# EAGLE board board 5 (EAGLE 5.06)
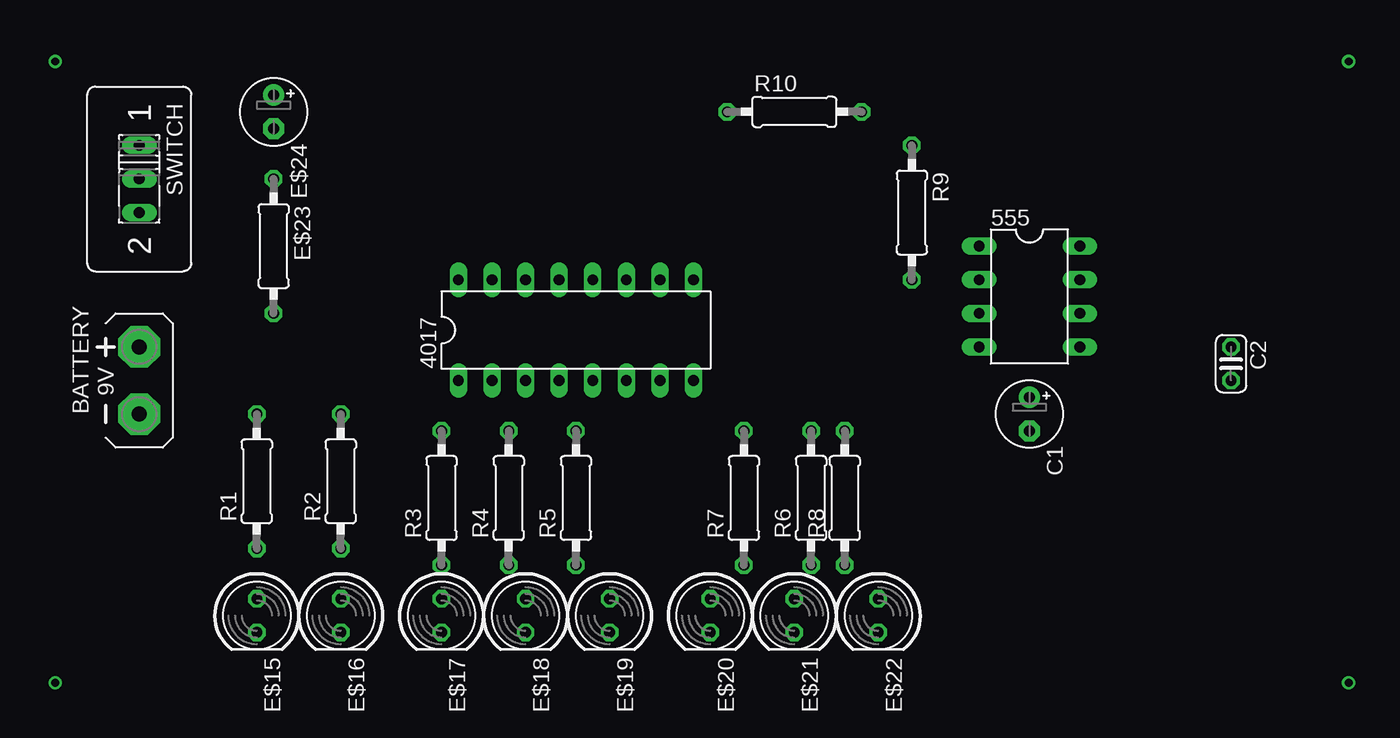
[diagram p0: board, top side]
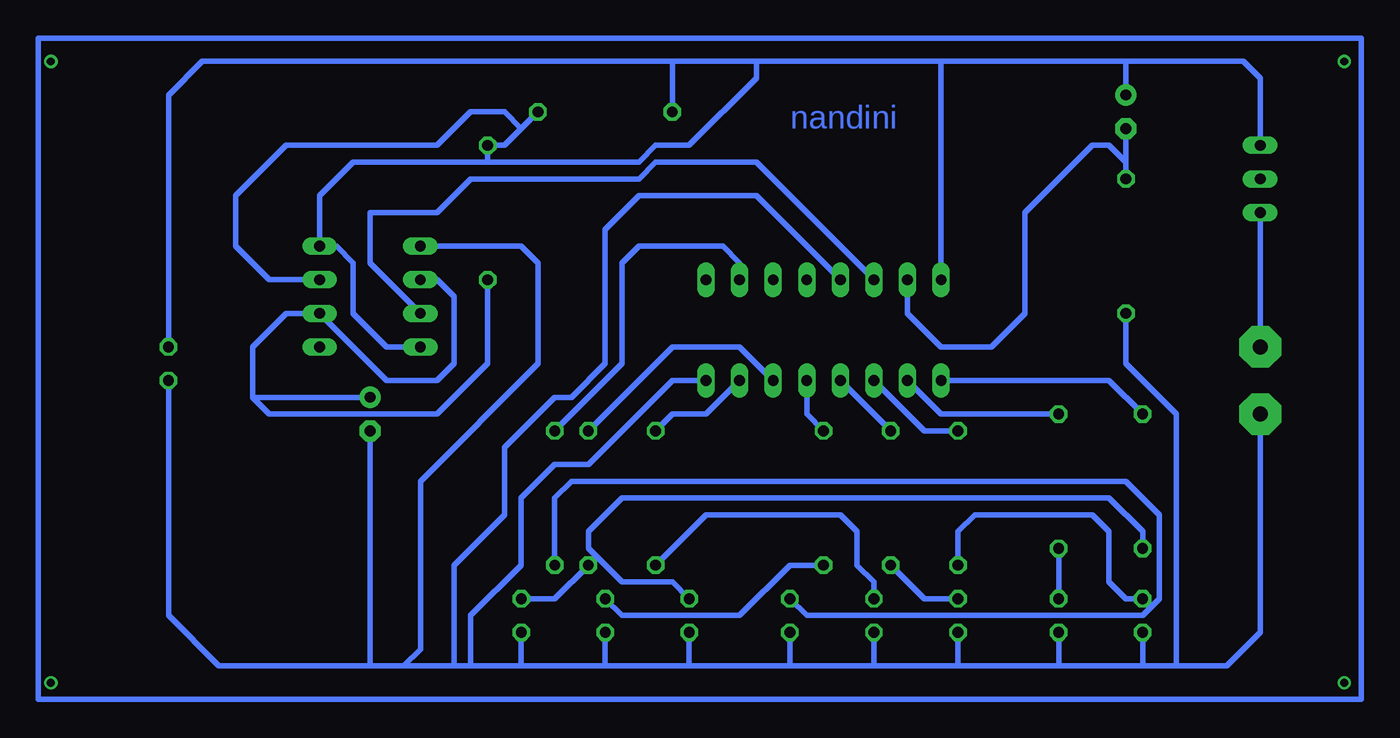
[diagram p1: board, bottom side, seen from below]

No outline drawn. Coordinates in mm, seen from the top.
Copper layers (1*16): Top 0.035mm / dielectric 1.5mm / Bottom 0.035mm
Design rules "default": minimum track width 10mil, minimum drill 24mil, track to track 8mil, track to pad 8mil, pad to pad 8mil, via to via 8mil, smd to smd 8mil, copper to edge 40mil, drill to drill 8mil, minimum pad ring 10mil, minimum via ring 8mil, stop-mask expansion 4mil, vias tented up to drill 0mil, thermal gap 10mil

## Footprints (pad centres in the part's own frame; a part is rotated, then mirrored left to right if it is on the bottom)
DIL08 = drill 0.813 long: 1 -3.81,-3.81; 2 -1.27,-3.81; 3 1.27,-3.81; 4 3.81,-3.81; 5 3.81,3.81; 6 1.27,3.81; 7 -1.27,3.81; 8 -3.81,3.81
DIL16 = drill 0.813 long: 1 -8.89,-3.81; 2 -6.35,-3.81; 3 -3.81,-3.81; 4 -1.27,-3.81; 5 1.27,-3.81; 6 3.81,-3.81; 7 6.35,-3.81; 8 8.89,-3.81; 9 8.89,3.81; 10 6.35,3.81; 11 3.81,3.81; 12 1.27,3.81; 13 -1.27,3.81; 14 -3.81,3.81; 15 -6.35,3.81; 16 -8.89,3.81
AB9V = drill 1.118 pad 3.15 octagon: + 0,2.54; - 0,-2.54
E2,5-5 = drill 0.813 pad 1.6 round: + -1.27,0 | drill 0.813 pad 1.6 octagon: - 1.27,0
C025-024X044 = drill 0.813 octagon: 1 -1.27,0; 2 1.27,0
LED5MM = drill 0.813 octagon: A -1.27,0; K 1.27,0
0207/10 = drill 0.813 octagon: 1 -5.08,0; 2 5.08,0
M251 = drill 0.813 long: 1 -2.54,0; 2 0,0; 3 2.54,0

## Placement (x,y rotation side)
555  [DIL08]  74.93,30.48 270 top
4017  [DIL16]  40.64,27.94 0 top
BATTERY  [AB9V]  7.62,24.13 0 top
C1  [E2,5-5]  74.93,21.59 270 top
C2  [C025-024X044]  90.17,25.4 270 top
E$15  [LED5MM]  16.51,6.35 270 top
E$16  [LED5MM]  22.86,6.35 270 top
E$17  [LED5MM]  30.48,6.35 270 top
E$18  [LED5MM]  36.83,6.35 270 top
E$19  [LED5MM]  43.18,6.35 270 top
E$20  [LED5MM]  50.8,6.35 270 top
E$21  [LED5MM]  57.15,6.35 270 top
E$22  [LED5MM]  63.5,6.35 270 top
E$23  [0207/10]  17.78,34.29 270 top
E$24  [E2,5-5]  17.78,44.45 270 top
R1  [0207/10]  16.51,16.51 90 top
R2  [0207/10]  22.86,16.51 90 top
R3  [0207/10]  30.48,15.24 90 top
R4  [0207/10]  35.56,15.24 90 top
R5  [0207/10]  40.64,15.24 90 top
R6  [0207/10]  58.42,15.24 90 top
R7  [0207/10]  53.34,15.24 90 top
R8  [0207/10]  60.96,15.24 90 top
R9  [0207/10]  66.04,36.83 270 top
R10  [0207/10]  57.15,44.45 0 top
SWITCH  [M251]  7.62,39.37 270 top

## Library data of the parts
555 4017 = ic-package
BATTERY = battery
C1 C2 E$23 E$24 R1-R10 = resistor
E$15-E$22 = led
SWITCH = switch

## Nets
S$2: 555.4 555.8 4017.16 C2.1 E$24.+ R10.1 SWITCH.1
S$4: 4017.1 R1.2
S$6: 4017.15 E$23.1 E$24.-
S$7: E$18.A R7.1
S$8: 4017.2 R2.2
S$9: 555.7 R9.1 R10.2
S$10: E$16.A R2.1
S$11: 4017.3 R3.2
S$12: E$15.A R3.1
S$13: 4017.4 R4.2
S$14: E$17.A R4.1
S$15: 4017.5 R5.2
S$16: 555.1 4017.8 4017.13 C1.- C2.2 E$15.K E$16.K E$17.K E$18.K E$19.K E$20.K E$21.K E$22.K E$23.2
S$17: 4017.6 R6.2
S$18: E$19.A R8.1
S$19: 4017.7 R7.2
S$20: E$20.A R1.1
S$21: 555.2 555.6 C1.+ R9.2
S$22: 4017.10 R8.2
S$23: E$21.A R5.1
S$24: E$22.A R6.1
S$25: 555.3 4017.14
S$28: BATTERY.+ SWITCH.3

## Tracks (layer width: path | path; a pad name or v marks a point on that pad's centre or on a via)
S$1
  Bottom 0.406: 0,0 100,0 100,50 0,50 0,0
S$2
  Bottom 0.406: 555.4 73.66,26.67 76.2,29.21 76.2,33.02 77.47,34.29 555.8 78.74,38.1 76.2,40.64 54.61,40.64 53.34,41.91 50.8,41.91 45.72,46.99 45.72,48.26 | C2.1 90.17,45.72 87.63,48.26 52.07,48.26 | 31.75,48.26 45.72,48.26 | 45.72,48.26 52.07,48.26 | 31.75,48.26 4017.16 | 17.78,48.26 31.75,48.26 | 17.78,48.26 E$24.+ | 17.78,48.26 8.89,48.26 7.62,46.99 SWITCH.1 | 52.07,48.26 R10.1
S$3  (via drill 0.6)
  other vias: 1.27,48.26
S$4
  Bottom 0.406: 4017.1 19.05,24.13 R1.2
S$6
  Bottom 0.406: 4017.15 34.29,29.21 31.75,26.67 27.94,26.67 25.4,29.21 25.4,36.83 20.32,41.91 19.05,41.91 17.78,40.64 | E$23.1 17.78,40.64 | 17.78,40.64 E$24.-
S$7
  Bottom 0.406: E$18.A 36.83,8.89 38.1,10.16 38.1,12.7 39.37,13.97 49.53,13.97 R7.1
S$8
  Bottom 0.406: 4017.2 31.75,21.59 R2.2
S$9
  Bottom 0.406: 555.7 82.55,31.75 85.09,34.29 85.09,38.1 81.28,41.91 69.85,41.91 67.31,44.45 64.77,44.45 63.5,43.18 | 66.04,40.64 R9.1 64.77,41.91 63.5,43.18 | 63.5,43.18 R10.2
S$10
  Bottom 0.406: R2.1 E$16.A
S$11
  Bottom 0.406: 4017.3 33.02,20.32 R3.2
S$12
  Bottom 0.406: R3.1 30.48,12.7 29.21,13.97 20.32,13.97 19.05,12.7 19.05,8.89 17.78,7.62 E$15.A
S$13
  Bottom 0.406: R4.2 4017.4
S$14
  Bottom 0.406: R4.1 33.02,7.62 E$17.A
S$15
  Bottom 0.406: 4017.5 41.91,21.59 R5.2
S$16
  Bottom 0.406: 4017.8 52.07,24.13 58.42,17.78 60.96,17.78 63.5,15.24 63.5,10.16 67.31,6.35 67.31,2.54 | 4017.13 45.72,38.1 54.61,38.1 57.15,35.56 57.15,25.4 59.69,22.86 60.96,22.86 64.77,19.05 64.77,13.97 68.58,10.16 68.58,2.54 | 555.1 63.5,34.29 62.23,33.02 62.23,25.4 71.12,16.51 71.12,3.81 72.39,2.54 | C2.2 90.17,6.35 86.36,2.54 74.93,2.54 | 74.93,2.54 C1.- | 72.39,2.54 74.93,2.54 | 68.58,2.54 72.39,2.54 | 63.5,2.54 67.31,2.54 | 67.31,2.54 68.58,2.54 | 63.5,2.54 E$22.K | 57.15,2.54 63.5,2.54 | 57.15,2.54 E$21.K | 50.8,2.54 57.15,2.54 | 50.8,2.54 E$20.K | 43.18,2.54 50.8,2.54 | 43.18,2.54 E$19.K | 36.83,2.54 43.18,2.54 | 36.83,2.54 E$18.K | 30.48,2.54 36.83,2.54 | 30.48,2.54 E$17.K | 22.86,2.54 30.48,2.54 | 22.86,2.54 E$16.K | E$23.2 17.78,25.4 13.97,21.59 13.97,2.54 | 16.51,2.54 22.86,2.54 | 16.51,2.54 E$15.K | 7.62,20.32 7.62,5.08 10.16,2.54 13.97,2.54 | 13.97,2.54 16.51,2.54
S$17
  Bottom 0.406: 4017.6 46.99,26.67 52.07,26.67 R6.2
S$18
  Bottom 0.406: R8.1 60.96,15.24 59.69,16.51 17.78,16.51 15.24,13.97 15.24,7.62 16.51,6.35 41.91,6.35 E$19.A
S$19
  Bottom 0.406: 4017.7 49.53,21.59 52.07,21.59 R7.2
S$20
  Bottom 0.406: R1.1 16.51,12.7 19.05,15.24 55.88,15.24 58.42,12.7 58.42,11.43 55.88,8.89 52.07,8.89 E$20.A
S$21
  Bottom 0.406: 555.2 69.85,31.75 68.58,30.48 68.58,25.4 69.85,24.13 73.66,24.13 555.6 81.28,29.21 83.82,26.67 83.82,22.86 | 83.82,22.86 C1.+ | 83.82,22.86 82.55,21.59 69.85,21.59 66.04,25.4 R9.2
S$22
  Bottom 0.406: 4017.10 46.99,33.02 48.26,34.29 54.61,34.29 55.88,33.02 55.88,25.4 R8.2
S$23
  Bottom 0.406: R5.1 43.18,10.16 46.99,6.35 55.88,6.35 E$21.A
S$24
  Bottom 0.406: R6.1 60.96,7.62 E$22.A
S$25
  Bottom 0.406: 555.3 74.93,33.02 74.93,36.83 69.85,36.83 67.31,39.37 54.61,39.37 53.34,40.64 45.72,40.64 4017.14
S$27  (via drill 0.6)
  other vias: 99.06,48.26
S$28
  Bottom 0.406: BATTERY.+ SWITCH.3
S$29  (via drill 0.6)
  other vias: 99.06,1.27
S$30  (via drill 0.6)
  other vias: 1.27,1.27

## Text on the board
Bottom: nandini